# Altium PCB PCB1.PcbDoc
Units mil, origin at the board's own origin, x right, y up, seen from the top; angles counter-clockwise.
Board outline 2558.85 x 1574.8 mil, 2 copper layers (Top Layer, Bottom Layer); 103 components, 76 nets, 372 pads, 67 vias.
Unrouted connection lines stored in the file: 144.
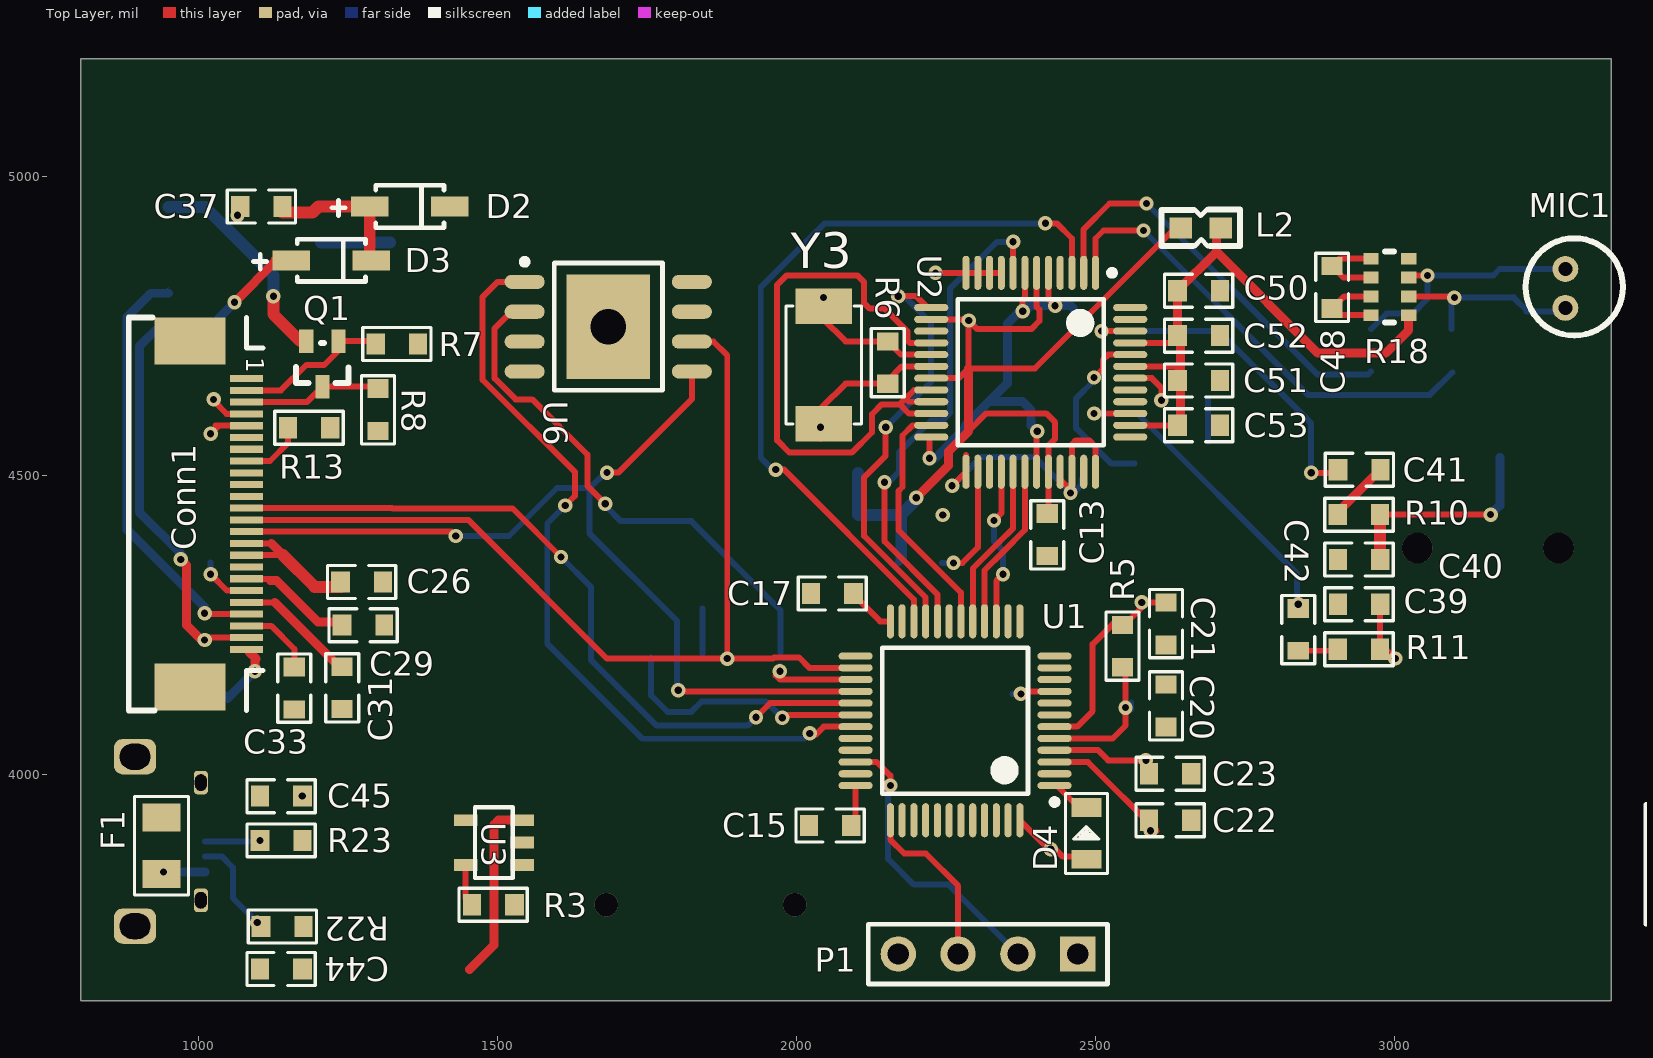
[diagram p0: Top Layer view]
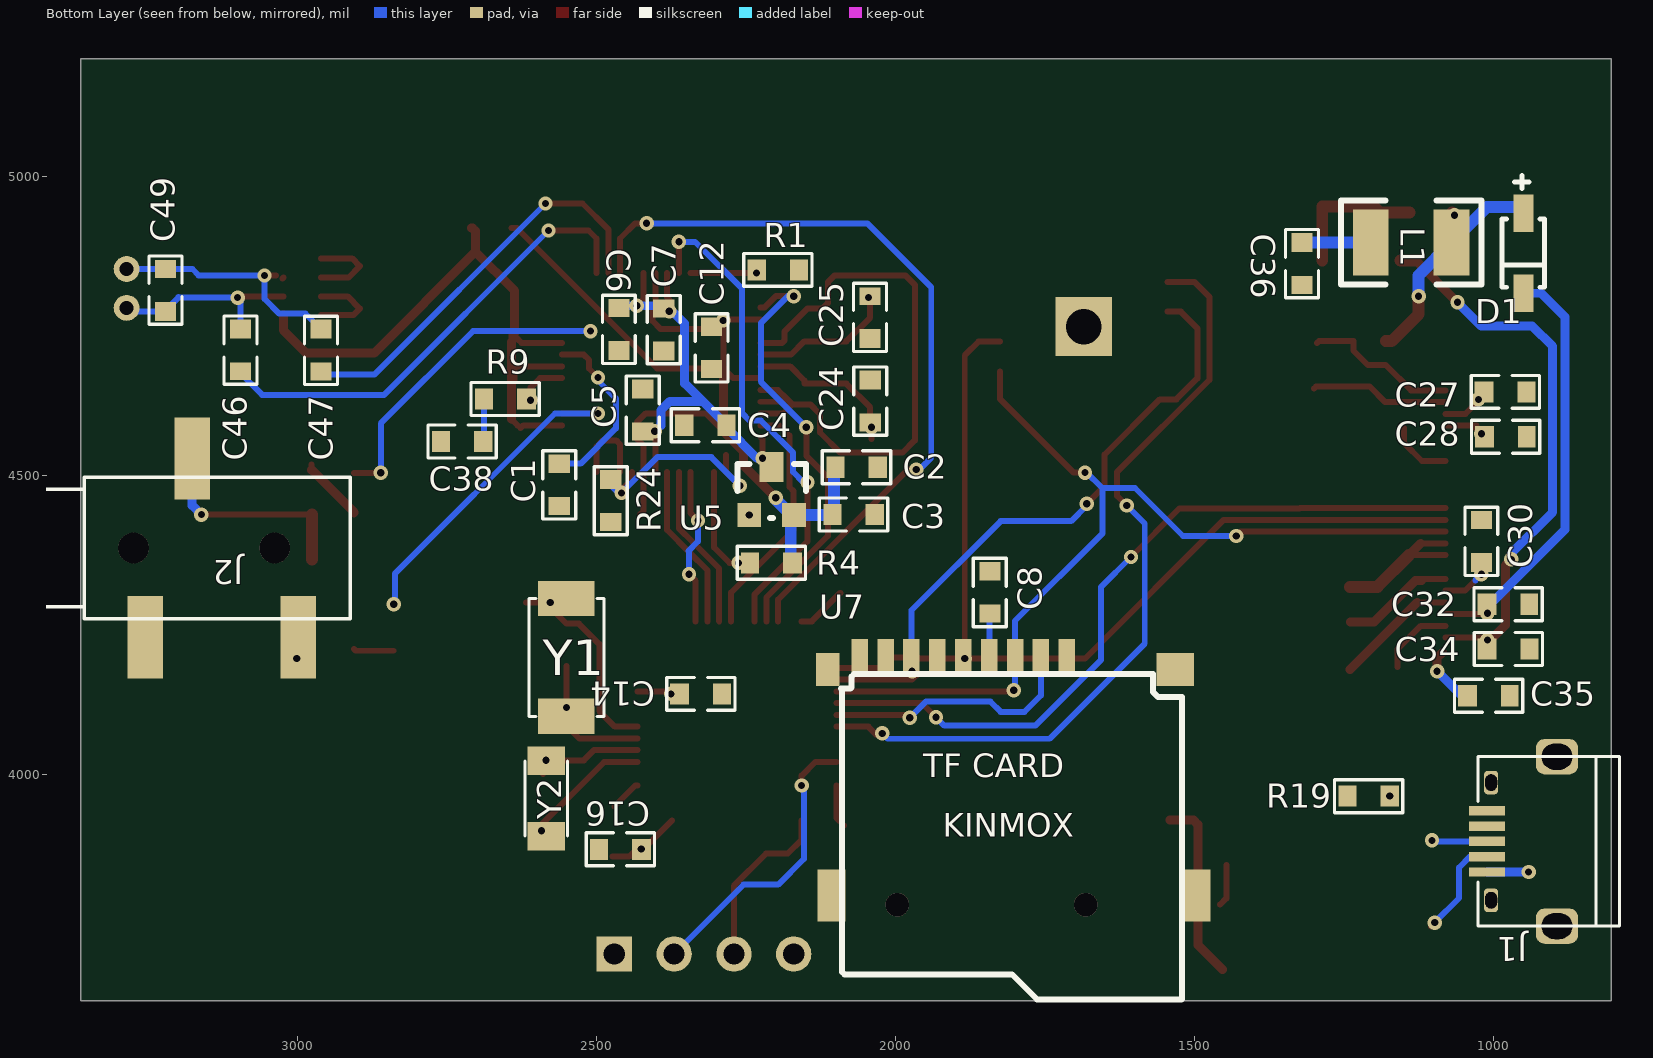
[diagram p1: Bottom Layer view, seen from below]

## Layer stack, top to bottom
Top Solder: solder mask 0.4, Solder Resist, Dk 3.5
Top Layer: signal copper 1.4
Dielectric 1: dielectric 12.6, FR-4, Dk 4.8
Bottom Layer: signal copper 1.4
Bottom Solder: solder mask 0.4, Solder Resist, Dk 3.5

## Board outline
803.15,3622.05 803.15,5196.85 3362,5196.85 3362,3622.05

## Design rules (kind name [scope] priority, off if disabled: settings)
Clearance [All] p1: gap=6 ignorepadtopadclearanceinfootprint=FALSE
HoleSize [All] p1: absolutevalues=TRUE maxlimit=100 minlimit=12 maxpercent=80.000 minpercent=20.000
PlaneConnect [All] p1: pad.planeconnectstyle=Relief pad.reliefexpansion=20 pad.reliefentries=4 pad.reliefconductorwidth=10 pad.reliefairgap=10 via.planeconnectstyle=Direct via.reliefexpansion=20 via.reliefentries=4 via.reliefconductorwidth=10 via.reliefairgap=10
PolygonConnect [All] p1: thpad.connectstyle=Relief thpad.reliefconductorwidth=10 thpad.reliefentries=4 thpad.polygonreliefangle="90 Angle" thpad.airgapwidth=10 smdpad.connectstyle=Relief smdpad.reliefconductorwidth=10 smdpad.reliefentries=4 smdpad.polygonreliefangle="90 Angle" smdpad.airgapwidth=10 via.connectstyle=Direct via.reliefconductorwidth=10 via.reliefentries=4 via.polygonreliefangle="90 Angle" via.airgapwidth=10
RoutingVias [All] p1: holewidth=12 width=24 viastyle="Through Hole" minholewidth=12 minwidth=24 maxholewidth=28 maxwidth=50
SilkToSilkClearance [All] p1: silktosilkclearance=5
SolderMaskExpansion [All] p1: expansion=4
UnRoutedNet [All] p1: checkbadconnections=TRUE
Width [All] p1: maxlimit=30 minlimit=6 preferedwidth=10
26 further rules are at their usual default settings.

## Components (designator, comment, footprint, x,y, rotation, side; value= is the part's Value field where it differs from the comment)
BT1 "Li-Pol" BAT-2 3470,3850 r90 top
C1 "Cap" 0603C 2562,4484.43 r90 bottom value=1uF
C2 "Cap" 0603C 2065,4514.09 r180 bottom locked value=10uF
C3 "Cap" 0603C 2070,4435 r180 bottom value=100nF
C4 "Cap" 0603C 2317.76,4584.09 r0 bottom value=10uF
C5 "Cap" 0603C 2422.32,4609.53 r90 bottom value=100nF
C6 "Cap" 0603C 2462.32,4744.53 r270 bottom value=100nF
C7 "Cap" 0603C 2387.32,4744.09 r270 bottom value=100nF
C8 "Cap" 0603C 1842,4304.57 r90 bottom value=100nF
C9 "Cap" 0603C 4055,3295.43 r0 top value=100nF
C10 "Cap" 0603C 1720,5469.05 r90 top value=100nF
C11 "Cap" 0603C 1795,5468.18 r90 top value=10uF
C12 "Cap" 0603C 2307.32,4713.66 r90 bottom value=10uF
C13 "Cap" 0603C 2419,4401 r90 top value=100nF
C14 "Cap" 0603C 2325.43,4135 r0 bottom value=100nF
C15 "Cap" 0603C 2056,3915 r0 top value=100nF
C16 "Cap" 0603C 2460,3875 r180 bottom value=100nF
C17 "Cap" 0603C 2059.57,4303 r0 top value=100nF
C18 "Cap" 0603C 4355,3775.43 r90 top value=100nF
C19 "Cap" 0603C 4575,3775.43 r90 top value=100nF
C20 "Cap" 0603C 2617.57,4115 r270 top value=18pF
C21 "Cap" 0603C 2617.57,4252.43 r270 top value=18pF
C22 "Cap" 0603C 2624.57,3923.66 r0 top value=18pF
C23 "Cap" 0603C 2624.57,4001.42 r0 top value=18pF
C24 "Cap" 0603C 2042,4624.57 r90 bottom value=18pF
C25 "Cap" 0603C 2042.32,4764.53 r270 bottom value=18pF
C26 "Cap" 0603C 1272.57,4322 r180 top value=10uF
C27 "Cap" 0603C 980,4640 r0 bottom value=1uF
C28 "Cap" 0603C 979.57,4565 r0 bottom value=1uF
C29 "Cap" 0603C 1275,4250 r180 top value=1uF
C30 "Cap" 0603C 1020,4390 r270 bottom value=1uF
C31 "Cap" 0603C 1240,4145 r90 top value=1uF
C32 "Cap" 0603C 975.43,4285 r0 bottom value=1uF
C33 "Cap" 0603C 1160,4144.57 r90 top value=1uF
C34 "Cap" 0603C 975,4210 r0 bottom value=1uF
C35 "Cap" 0603C 1008,4132 r0 bottom value=1uF
C36 "Cap" 0603C 1320,4854.53 r90 bottom value=10uF
C37 "Cap" 0603C 1105,4950 r180 top value=10uF
C38 "Cap" 0603C 2724.57,4557 r180 bottom value=47nF
C39 "Cap" 0603C 2940.47,4284.76 r0 top value=10nF
C40 "Cap" 0603C 2940.47,4359.76 r0 top value=10nF
C41 "Cap" 0603C 2940.91,4509.76 r180 top value=10uF
C42 "Cap" 0603C 2839,4242.57 r90 top value=10uF
C43 "Cap" 0603C 1293.78,3287.52 r90 top value=10nF
C44 "Cap" 0603C 1138,3675 r0 top value=10nF
C45 "Cap" 0603C 1138.13,3964 r0 top value=10nF
C46 "Cap" 0603C 3095,4710 r90 bottom value=1uF
C47 "Cap" 0603C 2960.47,4709.57 r90 bottom value=1uF
C48 "Cap" 0603C 2895.47,4814.76 r270 top value=10uF
C49 "Cap" 0603C 3220.47,4810.1 r270 bottom value=100pF
C50 "Cap" 0603C 2672.32,4809.09 r180 top value=10uF
C51 "Cap" 0603C 2672.32,4659.09 r180 top value=100nF
C52 "Cap" 0603C 2672.32,4734.09 r180 top value=100nF
C53 "Cap" 0603C 2672.32,4584.09 r180 top value=100nF
C54 "Cap" 0603C 4310,3129.57 r90 top value=10uF
Conn1 "eInkScreen" FPC-24P-0.5 989.45,4760.59 r270 top locked
D1 "MBR0530" SOD123 950,4938.86 r90 bottom locked
D2 "MBR0530" SOD123 1286.14,4950 r180 top locked
D3 "MBR0530" SOD123 1155,4860 r180 top locked
D4 "1N4148" 0805LED2 2485,3858.39 r90 top
F1 "PSMD075" 0805-1R 938,3881 r270 top
J1 "USB_MICRO" MicroUSB 915,3876 r270 bottom locked
J2 "Phonejack3" PJ-320B 3356.68,4379 r180 bottom locked
L1 "Inductor" 1210R 1205,4890 r180 bottom locked value=10uH
L2 "600R/100M" L0603 2681.2,4914.09 r180 top
MIC1 "Micphone" mic_4015 3300.47,4815.53 r180 top
P1 "Dbg" HDR1X4 2470,3700 r180 top
Q1 "Si1308" SOT323-N 1207,4687 r180 top
R1 "Res3" 0603R 2196.43,4844 r0 bottom value=100K
R2 "Res3" 0603R 2030,2470 r0 top value=100K
R3 "Res3" 0603R 1492.57,3782.43 r0 top value=2K
R4 "Res3" 0603R 2207.32,4354.09 r180 bottom value=100K
R5 "Res3" 0603R 2545,4215 r270 top locked value=1M
R6 "Res3" 0603R 2152.32,4689.09 r270 top value=1M
R7 "Res3" 0603R 1331.51,4720 r180 top value=10K
R8 "Res3" 0603R 1300,4610 r90 top value=3
R9 "Res3" 0603R 2652.57,4628 r180 bottom value=10
R10 "Res3" 0603R 2940.47,4434.76 r180 top value=20
R11 "Res3" 0603R 2940.47,4209.76 r180 top value=20
R13 "Res3" 0603R 1184.57,4580 r0 top value=10K
R14 "Res3" 0603R 2188.78,3287.52 r90 top value=8K
R15 "Res3" 0603R 1170.63,2569.72 r90 top value=22K
R16 "Res3" 0603R 2793.78,3287.52 r90 top value=10K
R17 "1K" YC164 4742.99,5767.01 r180 top
R18 "1K" YC164 2960.47,4768.27 r90 top
R19 "Res3" 0603R 1208.7,3964 r180 bottom locked value=10K
R22 "Res3" 0603R 1140,3746 r180 top value=22
R23 "Res3" 0603R 1138,3890 r180 top value=22
R24 "Res3" 0603R 2476,4458 r90 bottom value=100K
S1 "SW-PB" SPST-2 4440,5425.43 r90 top
S2 "SW-PB" SPST-2 4600,5425.43 r90 top
S3 "SW-PB" SPST-2 4770,5425.43 r90 top
S4 "SW-PB" SPST-2 4940,5425.43 r90 top
U1 "GD32F103CBT6" LQFP48-7x7 2265,4090 r180 top locked
U2 "VS1053" LQFP48-7x7 2391.54,4672.76 r270 top locked
U3 "LTC4054-4.2C" SOT23-5 1541,3849.03 r270 top
U4 "PT5110-3V3" SOT23 1640.63,5426.73 r90 top
U5 "PT5110-1V8" SOT23 2249.2,4433.46 r180 bottom locked
U6 "GD5F4GQ4UCYID" TSOP8+WSON8-6X5 1685,4749.1 r0 top
U7 "SD_Card" TF_self-eject 1713.3,4195.64 r180 bottom locked
Y1 "8M" XTAL-5032 2550,4196 r270 bottom
Y2 "32.768K" XTAL-3215 2584,3960 r270 bottom
Y3 "12.288M" XTAL-5032 2045.16,4685 r270 top

## Footprints (in the part's own frame and the unit in brackets; to place one, negate y for a bottom-side part, rotate by r counter-clockwise, add the part's x,y. Pads: shape width x height; smd on the part's side, far side on the other; paste and mask are expansions set on the pad)
0603C [mm]
  rect 0.762x0.9 smd: 1(-0.9,0)
  rect 0.8x0.9 smd: 2(0.9,0)
  silkscreen extent -1.45,-0.7 1.45,0.7
0603R [mm]
  rect 0.762x0.9 smd: 1(-0.9,0)
  rect 0.8x0.9 smd: 2(0.9,0)
  silkscreen extent -1.45,-0.7 1.45,0.7
0805-1R [mm]
  rect 1.2x1.6 smd: 1(-1.2,0) 2(1.2,0)
  silkscreen extent -2.1,-1.15 2.1,1.15
0805LED2 [mm]
  rect 0.8x1.27 smd: 1(0,0) 2(2.2,0)
  silkscreen extent -0.6,-0.89 2.8,0.89
1210R [mil]
  rect 60x110 smd: 1(0,0) 2(135,0)
  silkscreen extent -50,-70 185,70
BAT-2 [mm] "Battery; 2 Leads"
  rect 1.5x1.5 hole 0.9: 1(-1.27,0)
  round 1.5 hole 0.9: 2(1.27,0)
  silkscreen extent -2.54,-1.27 2.54,1.27
FPC-24P-0.5 [mm]
  rect 0.3x1.4 smd: 1(2.5,2.3) 2(3,2.3) 3(3.5,2.3) 4(4,2.3) 5(4.5,2.3) 6(5,2.3) 7(5.5,2.3) 8(6,2.3) 9(6.5,2.3) 10(7,2.3) 11(7.5,2.3) 12(8,2.3) 13(8.5,2.3) 14(9,2.3) 15(9.5,2.3) 16(10,2.3) 17(10.5,2.3) 18(11,2.3) 19(11.5,2.3) 20(12,2.3) 21(12.5,2.3) 22(13,2.3) 23(13.5,2.3) 24(14,2.3)
  rect 2x3 smd: 25(15.6,-0.1) 26(0.9,-0.1)
  silkscreen extent -0.1,-2.7 16.6,3, body extent 0.2,-2.86 16.29,3.04, height 2
HDR1X4 [mm] "Connector; Header; 4 Position"
  rect 1.5x1.5 hole 0.9: 1(0,0)
  round 1.5 hole 0.9: 2(2.54,0) 3(5.08,0) 4(7.62,0)
  silkscreen extent -1.27,-1.27 8.89,1.27
L0603 [mil]
  rect 38x35 smd: 1(-28,0) 2(38.87,0)
  silkscreen extent -60,-31 71,30
LQFP48-7x7 [mm] "TSQFP, 48-Leads, Body 7.00x7.00mm, Pitch 0.50mm, IPC Medium Density"
  oval 1.45x0.3 smd: 1(-4.225,2.75) 2(-4.225,2.25) 3(-4.225,1.75) 4(-4.225,1.25) 5(-4.225,0.75) 6(-4.225,0.25) 7(-4.225,-0.25) 8(-4.225,-0.75) 9(-4.225,-1.25) 10(-4.225,-1.75) 11(-4.225,-2.25) 12(-4.225,-2.75) 25(4.225,-2.75) 26(4.225,-2.25) 27(4.225,-1.75) 28(4.225,-1.25) 29(4.225,-0.75) 30(4.225,-0.25) 31(4.225,0.25) 32(4.225,0.75) 33(4.225,1.25) 34(4.225,1.75) 35(4.225,2.25) 36(4.225,2.75)
  oval 0.3x1.45 smd: 13(-2.75,-4.225) 14(-2.25,-4.225) 15(-1.75,-4.225) 16(-1.25,-4.225) 17(-0.75,-4.225) 18(-0.25,-4.225) 19(0.25,-4.225) 20(0.75,-4.225) 21(1.25,-4.225) 22(1.75,-4.225) 23(2.25,-4.225) 24(2.75,-4.225) 37(2.75,4.225) 38(2.25,4.225) 39(1.75,4.225) 40(1.25,4.225) 41(0.75,4.225) 42(0.25,4.225) 43(-0.25,4.225) 44(-0.75,4.225) 45(-1.25,4.225) 46(-1.75,4.225) 47(-2.25,4.225) 48(-2.75,4.225)
  silkscreen extent -4.35,-3.1 3.1,3.57, body extent -3.5,-3.5 3.5,3.5, height 0.8
mic_4015 [mm]
  round 1.1 hole 0.6: 1(0.381,0.889) 2(0.381,-0.762)
  silkscreen extent -2.07,-2.07 2.07,2.07
MicroUSB [mm]
  round 0 on Bottom Overlay: 0(0.986,-3.776)
  rect 0.4x1.524 smd: 1(0.986,-2.426) 2(0.336,-2.426) 3(-0.314,-2.426) 4(-0.964,-2.426) 5(-1.614,-2.426)
  rrect50% 1.5x1.8 hole 1.1 slot 1.3 at 90 deg: 5(-3.911,0.543) 5(3.286,0.543)
  rrect50% 1x0.6 hole 0.5 slot 0.7 at 0 deg: 5(-2.812,-2.254) 5(2.188,-2.254)
  silkscreen extent -3.91,-2.81 3.29,3.19
PJ-320B [mm]
  round 1.3 hole 1.3: 0(2.1,0) 0(8.1,0)
  rect 1.5x3.5 smd: 1(9.1,-3.8) 3(4.6,3.8) 5(2.6,-3.8)
  silkscreen extent -2.7,-3 11.3,3, body extent -2.7,-5.2 11.3,5.2, height 5
SOD123 [mm]
  rect 1.6x0.85 smd: 1(0,0) 2(-3.4,0)
  silkscreen extent -3.15,-0.9 1.6,0.9
SOT23 [mil]
  rect 40x40 smd: 1(4.88,0.63) 3(79.88,0.63)
  rect 40x50 smd: 2(41.88,80.63)
  silkscreen extent -15,-4 100,86
SOT23-5 [mm]
  rect 0.5x1 smd: 1(0,0) 2(-0.95,0) 3(-1.9,0) 4(-1.9,-2.4) 5(0,-2.4)
  silkscreen extent -2.45,-2 0.55,-0.4
SOT323-N [mm]
  rect 0.6x1 smd: 1(-0.686,-0.965) 2(0.686,-0.965) 3(0,0.965)
  silkscreen extent -1.12,-0.89 1.12,0.81
SPST-2 [mm] "Switch; 2 Leads"
  rect 1.85x1.85 hole 1.1: 1(-2.54,0)
  round 1.85 hole 1.1: 2(2.54,0)
  silkscreen extent -4.89,-1.27 4.28,1.27
TF_self-eject [mm]
  rect 0.7x1.6 smd: 1(0,0) 2(-1.1,0) 3(-2.2,0) 4(-3.3,0) 5(-4.4,0) 6(-5.5,0) 7(-6.6,0) 8(-7.7,0) 9(-8.8,0)
  rect 1x1.4 smd: 10(-10.16,-0.508)
  rect 1.6x1.4 smd: 11(4.6,-0.5)
  rect 1.2x2.2 smd: 12(5.5,-10.1) 13(-10,-10.1)
  silkscreen extent -9.59,-14.52 4.9,-0.7, body extent -10.2,-17.1 5.8,0.72, height 1.85
TSOP8+WSON8-6X5 [mm] "TSOP, 8-Leads, Body 5.28x5.28mm, Pitch 1.27mm, Thermal Pad 4.45x3.55mm, IPC Medium Density"
  oval 1.7x0.6 smd: 1(-3.55,1.905) 2(-3.55,0.635) 3(-3.55,-0.635) 4(-3.55,-1.905) 5(3.55,-1.905) 6(3.55,-0.635) 7(3.55,0.635) 8(3.55,1.905)
  rect 2.4x2.5 hole 1.5: 4(0,0)
  rect 3.55x4.45 smd: 4(0,0)
  silkscreen extent -3.67,-2.7 2.3,2.88, body extent -2.7,-2.7 2.7,2.7, height 0.8
XTAL-3215 [mm]
  rect 1.2x1.6 smd: 1(-1.6,0) 2(1.6,0)
  silkscreen extent -1.6,-0.9 1.6,0.9
XTAL-5032 [mm]
  rect 1.5x2.4 smd: 1(-2.5,0) 2(2.5,0)
  silkscreen extent -2.5,-1.6 2.5,1.6
YC164 [mm]
  rect 0.5x0.65 smd: 1(0,0) 2(0.8,0) 3(1.6,0) 4(2.4,0) 5(2.4,-1.6) 6(1.6,-1.6) 7(0.8,-1.6) 8(0,-1.6)
  silkscreen extent -0.3,-0.98 2.7,-0.6, body extent -0.3,-1.6 2.7,0, height 1

## Part data
BT1: library part Battery, "Multicell Battery", LatestRevisionDate=17-Jul-2002, LatestRevisionNote="Re-released for DXP Platform.", PackageDescription="Battery; 2 Leads", PackageReference=BAT-2, Published=24-Mar-1999, Publisher="Altium Limited"
C1 C2 C3 C4 C5 C6 C7 C8 C9 C10 C11 C12 C13 C14 C15 C16 C17 C18 C19 C20 C21 C22 C23 C24 C25 C26 C27 C28 C29 C30 C31 C32 C33 C34 C35 C36 C37 C38 C39 C40 C41 C42 C43 C44 C45 C46 C47 C48 C49 C50 C51 C52 C53 C54: "Capacitor", LatestRevisionDate=17-Jul-2002, LatestRevisionNote="Re-released for DXP Platform.", PackageDescription="Radial Cap, Thru-Hole; 2 Leads; 0.3 in Pin Spacing", PackageReference=RAD-0.3, Published=8-Jun-2000, Publisher="Altium Limited"
Conn1: library part eINK_FPC24
D1 D2 D3: library part "D Schottky", "Schottky Diode", Code_JEDEC=DO-214-AA, LatestRevisionDate=17-Jul-2002, LatestRevisionNote="Re-released for DXP Platform.", PackageDescription="DO-214-AA/SMB; 2 C-Bend Leads; Body 5.3 x 3.6 mm, inc. leads (LxW)", PackageReference=SMB, Published=8-Jun-2000, Publisher="Altium Limited"
D4: library part "Diode 1N4148", "High Conductance Fast Diode", Code_JEDEC=DO-204-AH, ComponentLink1Description="Manufacturer Link", ComponentLink1URL=http://www.fairchildsemi.com/, ComponentLink2Description=Datasheet, ComponentLink2URL=http://www.fairchildsemi.com/ds/1N%2F1N4148.pdf, DatasheetVersion=1997, LatestRevisionDate=17-Jul-2002, LatestRevisionNote="Re-released for DXP Platform.", PackageDescription="Diode, Axial; Body 3.8 x 1.9 mm (LxDia. max), Lead Dia. 0.53 mm (max)", PackageReference=DO-35, Published=8-Jun-2000, Publisher="Altium Limited"
F1: library part "Fuse 2", "Fuse", LatestRevisionDate=17-Jul-2002, LatestRevisionNote="Re-released for DXP Platform.", PackageDescription="Thru-Hole; 2 Leads", PackageReference=PIN-W2/E2.8, Published=8-Jun-2000, Publisher="Altium Limited"
J2: "Jack Socket, 1/4\" [6.5mm], Thru-Hole, Vertical, 3-Conductor Open Circuit (Non-Normalling)", PackageDocument=2003, ComponentLink1Description="Manufacturer Link", ComponentLink1URL=http://www.cliffuk.co.uk/, DatasheetDocument=2003, DrillAndSlotSize="Corresponds to nominal value.", LatestRevisionDate=15-Jul-2004, LatestRevisionNote="Component Replaced.", PackageReference=S1VS_SSS, PCB_Layout="Complies with manufacturer's recommendation.", Published=15-Jul-2004, Publisher="Altium Limited"
L2: library part INDUCTOR_0_Dup1, "RoHS BEAD/600ohm 100Mhz Z=600Ω DCR<0.2Ω 800mA SMT L0603", Package=SMT, OriginalSymbolOrigin=(10,0), Pin Names Rotate=TRUE, Pin Names Visible=FALSE, Pin Numbers Visible=TRUE
MIC1: library part Micphone_0, mypage=13
P1: library part "Header 4", "Header, 4-Pin", LatestRevisionDate=17-Jul-2002, LatestRevisionNote="Re-released for DXP Platform.", Publisher="Altium Limited"
Q1: library part PwrMOS_N
R1 R2 R3 R4 R5 R6 R7 R8 R9 R10 R11 R13 R14 R15 R16 R19 R22 R23 R24: "Resistor", LatestRevisionDate=29-May-2009, LatestRevisionNote="IPC-7351 Footprint Added.", PackageDescription="Chip Resistor", PackageReference=J1-0603, Published=8-Jun-2000, Publisher="Altium Limited"
R17 R18: library part ResPak-8P4R
S1 S2 S3 S4: "Switch", LatestRevisionDate=17-Jul-2002, LatestRevisionNote="Re-released for DXP Platform.", PackageDescription="Switch; 2 Leads", PackageReference=SPST-2, Published=24-Mar-1999, Publisher="Altium Limited"
U1: library part STM32F103CxT6
U3: library part LTC4054
U4 U5: library part PT5110
U6: library part W25Qxx
Y1 Y2 Y3: library part XTAL, "Crystal Oscillator", LatestRevisionDate=17-Jul-2002, LatestRevisionNote="Re-released for DXP Platform.", PackageDescription="Crystal, Thru-Hole; 2 Leads; Body 3.1 x 8.2 mm (Dia.xH)", PackageReference=R38, Published=8-Jun-2000, Publisher="Altium Limited"
L1: Code_IEC=1005, Code_JEITA=0402, LatestRevisionDate=29-May-2009, LatestRevisionNote="IPC-7351 Footprint Added.", PackageDescription="Chip Inductor", PackageReference=0402-A, Published=8-Jun-2000, Publisher="Altium Limited"

## Via types
v1: diameter 24, hole 12, Top Layer to Bottom Layer, 65 vias
v2: diameter 39.37, hole 39.37, Top Layer to Bottom Layer, 2 vias

## Nets (pads, with @x,y where several pads share a name; then routed paths per layer and width w, separated by ;. In a path a pad name is that pad's centre, name@x,y a point inside that pad or via, vN(x,y) a via of type N, cw(c..) or ccw(c..) an arc to the next point about the centre after c; other vN are vias at no path point)
1V8: C4.1 C5.1 C6.1 C7.1 U2.5 U2.7 U2.24 U2.31 U5.2 | length 785.1
  Top Layer w10: v1(2222.32,4529.09) 2222.32,4561.61 U2.24 ; v1@2374.6,4768 2378,4771.4 v1(2378,4775) 2378,4794 2381.69,4797.69 U2.7 ; U2.31 2401.38,4573.15 v1(2402.32,4574.09) ; U2.5 2421.32,4838.83 2421.32,4795.09 v1(2432.32,4784.09)
  Bottom Layer w10: C4.1@2282.32,4579.84 C4.1
  Bottom Layer w15: v1(2222.32,4529.09) 2231.57,4529.09 C4.1@2282.32,4579.84 ; C4.1 2322.32,4624.09 ; v1(2378,4775) 2381.66,4775 2377.66,4779 C7.1@2378.19,4779.53 ; v1(2402.32,4574.09) 2392.32,4584.09 2392.32,4609.09 2377.32,4624.09 2322.32,4624.09 ; C6.1 2458.19,4784.09 v1(2432.32,4784.09) 2391.89,4784.09 C7.1 ; 2322.32,4624.09 2352.32,4654.09 2352.32,4754.09 2377.76,4779.53 C7.1@2378.19,4779.53 ; C7.1@2378.19,4779.53 2382.76,4784.09 C7.1 ; C7.1@2378.19,4779.53 C7.1
3V3: C2.1 C3.1 C8.1 C9.2 C12.2 C13.2 C14.2 C15.2 C16.2 C17.2 C18.2 C19.2 C26.2 C36.2 Conn1.15 Conn1.16 D4.1 L1.1 L2.2 P1.1 R4.2 R16.1 R17.5 R17.6 R17.7 R17.8 U1.9 U1.24 U1.36 U1.48 U2.6 U2.14 U2.19 U2.32 U4.2 U5.3 U6.3 U6.7 U6.8 U7.4 | length 2515.2
  Top Layer w10: Conn1.16 1141.11,4366.89 ; Conn1.15 1121.42,4386.57 ; C15.2@2085.87,3915 2098.66,3927.8 U1.36 ; C17.2@2092,4304 2139.66,4256.34 U1.24 ; U2.19 2271.14,4662.91 2287.76,4679.53 ; U2.14 2285.94,4761.34 v1(2287.76,4759.53) ; 2287.76,4574.53 2317.32,4604.09 2417.32,4604.09 2432.32,4589.09 2432.32,4561.57 2421.06,4550.31 U2.32 2421.06,4440.79 C13.2@2427.32,4434.53 ; U1.48 v1@2423.25,3873.68 ; v1(2375,4135) 2379.21,4139.21 U1.9 ; U2.6 2401.38,4782.15 2406,4777.53 2406,4758.47 2392.53,4745 2302.28,4745 v1(2287.76,4759.53) ; v1@2428.78,3879.22 2445.28,3862.72 D4.1@2472.72,3862.72 ; L2.2 2633.09,4914.09 2398.53,4679.53 2287.76,4679.53 ; 2287.76,4679.53 v1(2287.76,4759.53)
  Top Layer w15: 1121.42,4386.57 1141.11,4366.89 ; v1(2200,4463) 2254,4517 2254,4540.77 2287.76,4574.53 2287.76,4679.53
  Top Layer w20: 1141.11,4366.89 1194,4314 C26.2@1240,4314
  Bottom Layer w10: C8.1@1842.43,4278 1842.43,4196.43 U7.4 ; C3.1@2102.32,4434.96 C3.1@2103.19,4434.09 ; R4.2 2169.32,4356.66 R4.2@2175,4362.34 ; v1@2198.23,4463 v1(2200,4463) v1@2200,4460 ; C14.2 v1(2375,4135) ; C16.2 v1(2425,3875.43)
  Bottom Layer w20: L1.1 C36.2 C36.2 ; C3.1@2102.32,4434.96 C2.1@2102.32,4504.09 ; C3.1@2103.19,4434.09 U5.3 ; R4.2@2175,4362.34 2175,4435 v1@2200,4460
3V3_A: C50.2 C51.2 C52.2 C53.2 L2.1 R18.8 U2.38 U2.43 U2.45 | length 1072
  Top Layer w10: U2.38 2622.24,4584.17 C53.2@2627.11,4579.31 ; U2.43 2636.89,4682.6 C51.2 C51.2@2642.32,4659.09 ; U2.45 2625.2,4721.97 C52.2@2631.46,4728.23 ; C53.2@2631.89,4584.09 C53.2@2642.32,4594.53 ; C52.2@2634.61,4731.38 2639.32,4736.09 2642.32,4739.09 2642.32,4723.66 C52.2@2639.32,4726.66
  Top Layer w15: C52.2@2639.32,4736.09 2636.89,4738.53 C50.2 2702.32,4874.53 ; C53.2@2642.32,4594.53 2642.32,4659.09 C52.2@2642.32,4723.66 ; L2.1 2707.32,4914.09 2702.32,4909.09 2702.32,4874.53 ; R18.8 3023.46,4743.46 2985,4705 2871.85,4705 2702.32,4874.53
5V: C54.2 F1.1 R2.1 U3.4
C\H\R\G\: R2.2 U1.38 U3.1
DREQ: U1.20 U2.8 | length 843.5
  Top Layer w10: v1(2147,4489) 2147,4390 2235.47,4301.53 U1.20 ; U2.8 v1(2362.01,4890.99)
  Bottom Layer w10: v1(2147,4489) 2154,4489 2171,4506 2171,4538.33 2224.67,4592 2244,4592 2256.32,4604.32 2256.32,4812.32 2334.99,4890.99 v1(2362.01,4890.99)
GDR: Conn1.2 Q1.1 R7.2 | length 259.4
  Top Layer w10: Conn1.2 1137.48,4642.48 1180,4685 1210,4685 1234,4709 Q1.1 1291.54,4725 R7.2@1294.57,4721.97
GND: BT1.2 C1.1 C2.2 C3.2 C4.2 C5.2 C6.2 C7.2 C8.2 C9.1 C10.1 C11.1 C12.1 C13.1 C14.1 C15.1 C16.1 C17.1 C18.1 C19.1 C20.2 C21.2 C22.2 C23.2 C24.2 C25.2 C26.1 C27.1 C28.1 C29.1 C30.1 C31.1 C32.1 C33.1 C34.1 C35.1 C36.1 C38.1 C39.1 C40.1 C43.1 C44.1 C45.1 C50.1 C51.1 C52.1 C53.1 C54.1 Conn1.17 Conn1.25 Conn1.26 D2.2 J1.4 J1.5 J2.5 P1.4 R1.1 R3.2 R7.1 R8.1 R13.2 R15.2 R18.5 R24.1 S1.1 S2.1 S3.1 S4.1 U1.8 U1.23 U1.35 U1.44 U1.47 U2.4 U2.16 U2.20 U2.21 U2.22 U2.35 U2.37 U2.40 U2.41 U2.47 U3.2 U4.1 U5.1 U6.4 U7.6 U7.10 U7.11 U7.12 U7.13 | length 1032.8
  Top Layer w10: U2.22 2187.56,4603.86 2172.32,4619.09 ; U2.21 2187.87,4623.54 2182.32,4629.09 ; U2.20 2196.46,4643.23 2182.32,4629.09 ; U2.16 2189.45,4721.97 2185.65,4725.76 2185.65,4740.76 2147.32,4779.09 2122.32,4779.09 2112.32,4789.09 2112.32,4824.09 2101.42,4835 1983.23,4835 1967.32,4819.09 1967.32,4559.09 1988.09,4538.33 2092.15,4538.33 2126,4572.18 2126,4602.77 2142.32,4619.09 2172.32,4619.09 ; 2172.32,4619.09 2182.32,4629.09
  other v1: 2244.32,4434.09
KEY1: R17.1 S1.2 U1.19
KEY2: R17.2 S2.2 U1.25
KEY3: R17.3 S3.2 U1.43
KEY4: R17.4 S4.2 U1.46
MICN: C47.1 U2.2 | length 691.3
  Top Layer w10: U2.2 2480.12,4911.89 2523.23,4955 v1(2585,4955)
  Bottom Layer w10: v1(2585,4955) 2870.67,4669.33 2955.67,4669.33 C47.1
MICP: C46.1 U2.1 | length 789.6
  Top Layer w10: U2.1 2499.8,4896.57 2513.23,4910 v1(2580,4910)
  Bottom Layer w10: v1(2580,4910) 2855,4635 3059,4635 C46.1@3096.78,4672.78
NetC1_2: C1.2 U2.44 | length 304.4
  Top Layer w10: v1(2497.32,4664.09) 2512.32,4679.09 2512.32,4693.5 2521.11,4702.28 U2.44
  Bottom Layer w10: v1(2497.32,4664.09) 2497.32,4659.09 2467.32,4629.09 2467.32,4579.09 2526.42,4520 C1.2@2565,4520
NetC27_2: C27.2 Conn1.4 | length 66.6
  Top Layer w10: v1(1025,4627.5) 1025,4625 1046.89,4603.11 Conn1.4
NetC28_2: C28.2 Conn1.5 | length 77.6
  Top Layer w10: v1(1020,4570) 1033.42,4583.43 ; 1028.42,4583.43 Conn1.5
  Bottom Layer w10: C28.2 v1(1020,4570)
NetC29_2: C29.2 Conn1.18 | length 189.2
  Top Layer w10: Conn1.18 1117.48,4327.52 1120,4325
  Top Layer w15: 1120,4325 1130,4325 1200,4255 C29.2@1239.13,4255
NetC30_2: C30.2 Conn1.19 | length 105
  Top Layer w10: v1(1020,4335) 1047.16,4307.84 Conn1.19
  Bottom Layer w10: C30.2 v1(1020,4335) 1030,4325
NetC31_2: C31.2 Conn1.20 | length 206.7
  Top Layer w10: Conn1.20 1127.28,4288.15
  Top Layer w15: 1127.28,4288.15 C31.2@1240,4175.43
NetC33_2: C33.2 Conn1.22 | length 126.1
  Top Layer w10: Conn1.22 1121.22,4248.78 1160,4210 C33.2
NetC35_2: C35.2 Conn1.24 | length 108.3
  Top Layer w15: Conn1.24@1085,4204.41 1096,4193.41 1094,4191.41 v1(1094,4173)
  Bottom Layer w15: C35.2 1048.22,4127.22 v1(1094,4173)
NetC37_1: C37.1 D2.1 D3.2 | length 239.9
  Top Layer w20: C37.1@1140.43,4940 1190.43,4940 1200.43,4950 D2.1 D3.2@1286.14,4860
NetC37_2: C37.2 D1.1 L1.2 Q1.2 | length 367.3
  Top Layer w20: v1(1065,4935.43) C37.2@1069.57,4940 ; v1(1125,4800) 1125,4770 1170,4725 Q1.2
  Bottom Layer w20: D1.1@950,4948.86 1011.14,4948.86 L1.2 1125,4835 v1(1125,4800)
NetC38_2: C38.2 R9.1 | length 71.5
  Bottom Layer w10: R9.1 2688,4558.13 C38.2
NetC39_2: C39.2 J2.1 R11.1 | length 106.7
  Top Layer w10: C39.2 R11.1 2985.47,4209.76 v1(3001.1,4194.13)
NetC40_2: C40.2 J2.3 R10.1 | length 361.2
  Top Layer w10: R10.1 v1(3160.47,4434.76)
  Top Layer w20: C40.2 R10.1
  Bottom Layer w15: v1(3160.47,4434.76) 3176,4450.29 J2.3@3176,4530
NetC41_1: C41.1 R10.2 | length 113.7
  Top Layer w10: R10.2 R10.2@2905.04,4438.46 ; C41.1 C41.1@2976.34,4518.9
  Top Layer w15: R10.2@2905.04,4438.46 C41.1
NetC41_2: C41.2 U2.46 | length 590.2
  Top Layer w10: v1(2509.88,4741.65) U2.46 ; v1(2860.47,4504.76) C41.2@2905.47,4504.76
  Bottom Layer w10: v1(2509.88,4741.65) 2706.35,4741.65 2860.47,4587.53 v1(2860.47,4504.76)
NetC42_1: C42.1 R11.2 | length 67.1
  Top Layer w10: C42.1 2902.41,4207.13 R11.2
NetC42_2: C42.2 U2.39 | length 569.5
  Top Layer w10: v1(2497.56,4603.86) U2.39 ; C42.2 v1(2839,4285)
  Bottom Layer w10: v1(2497.56,4603.86) 2569.14,4603.86 2837,4336 2837,4287 v1(2839,4285)
NetC46_2: C46.2 C49.2 MIC1.1 R18.7 | length 331.9
  Top Layer w10: R18.7 v1@3100,4799.76
  Bottom Layer w10: C46.2 3095,4792.69 v1(3100,4797.69) 3200,4797.69 ; 3198.41,4798.46 3221.34,4775.53 C49.2 3279.61,4774.67 MIC1.1
NetC47_2: C47.2 C49.1 MIC1.2 R18.6 | length 410.4
  Top Layer w10: R18.6 R18.6@3024.96,4829.76 ; R18.6@3035.47,4834.76 v1(3055,4834.76)
  Bottom Layer w10: C47.2 2986.47,4771 3030.33,4771 3055,4795.67 v1(3055,4834.76) 3165,4834.76 ; 3165.47,4835.53 3175.47,4845.53 C49.1 MIC1.2
NetC48_1: C48.1 R18.3 R18.4 | length 143.5
  Top Layer w10: R18.3 2914.41,4831.26 C48.1 2908.54,4863.27 2959.96,4863.27 R18.4
NetC48_2: C48.2 R18.1 R18.2 | length 143
  Top Layer w10: R18.1 2906.54,4768.27 C48.2 2915.91,4799.76 R18.2
NetConn1_8: Conn1.8 R13.1 | length 107.3
  Top Layer w10: Conn1.8 1119.37,4524.37 1149.13,4554.13 R13.1
NetD4_2: D4.2 U1.1 | length 53.2
  Top Layer w10: U1.1 2434.88,3981.73 D4.2@2470,3946.61
NetF1_2: F1.2 J1.1 | length 69.5
  Bottom Layer w15: v1(941,3837.17) J1.1
NetJ1_2: J1.2 R22.2 | length 172.6
  Top Layer w10: v1(1098,3752.57) R22.2
  Bottom Layer w10: J1.2 1039.24,3862.76 1057.24,3844.76 1057.24,3793.76 1098,3753 v1(1098,3752.57)
NetJ1_3: J1.3 R23.2 | length 92.7
  Bottom Layer w10: J1.3 1100.92,3888.35 v1(1102.57,3890)
NetR1_2: R1.2 U2.9 U2.10 U2.11 U2.12 | length 110
  Top Layer w10: v1(2232.32,4839.09) U2.12 U2.11 U2.10 U2.9
NetR3_1: R3.1 U3.5 | length 71
  Top Layer w10: U3.5 1446.51,3793.06 R3.1
NetR4_1: R4.1 U2.26 | length 197.5
  Top Layer w10: v1(2262.32,4354.09) 2277.32,4354.09 2302.95,4379.72 U2.26
  Bottom Layer w10: R4.1 v1(2262.32,4354.09)
NetR9_2: R9.2 U2.42 | length 85.6
  Top Layer w10: U2.42 2594.09,4662.91 2610,4647 v1(2610,4626)
  Bottom Layer w10: v1(2610,4626) R9.2@2610,4631.87
NetR24_2: R24.2 U2.25 U2.33 U2.34 U2.36 | length 515.3
  Top Layer w10: v1(2260,4483.15) U2.25 U2.25@2283.27,4534.27 ; U2.33 2440.75,4493.25 2460.43,4473.57 v1(2458,4471.13) ; U2.34 2460.43,4552.43 2467,4559 2489.61,4559 2499.8,4548.8 U2.36
  Bottom Layer w10: v1(2260,4483.15) 2307.85,4531 2398.13,4531 v1(2458,4471.13) 2463.13,4471.13 2476,4484 R24.2
RESE: Conn1.3 Q1.3 R8.2 | length 232.3
  Top Layer w10: Conn1.3 1180.8,4622.8 Q1.3 1296.43,4649 R8.2
RST: C43.2 Conn1.10 R16.2 U1.7
ScrBusy: Conn1.9 U1.40
ScrD/C: Conn1.11 U1.39
SPI1_CS#: U1.18 U2.23 | length 412.3
  Top Layer w10: U2.23 2194.17,4584.17 2177,4567 2177,4481 2170,4474 2170,4409 2274.84,4304.16 U1.18
SPI1_MISO: U1.16 U2.30 | length 278.1
  Top Layer w10: U1.16 2314.21,4341.74 2345.47,4373 2345.63,4373 2381.69,4409.07 U2.30
SPI1_MOSI: U1.17 U2.29 | length 278.1
  Top Layer w10: U1.17 2294.85,4256.66 2294.85,4345 2338.85,4389 2339,4389 2362.01,4412.01 U2.29
SPI1_SCK: U1.15 U2.28 | length 267
  Top Layer w10: v1(2330,4425) 2342.32,4437.32 U2.28 ; U1.15 2333.9,4323.9 v1(2345,4335)
  Bottom Layer w10: v1(2330,4425) 2330,4390 2346.24,4373.76 2345,4372.53 v1(2345,4335)
SPI2_CS#1: Conn1.12 U1.29 | length 1256.2
  Top Layer w10: Conn1.12 1323.37,4445.63 1324,4445 1525,4445 v1(1606,4364) ; v1(1932,4096) 1955.53,4119.53 U1.29
  Bottom Layer w10: v1(1606,4364) 1656,4314 1656,4192.1 1766.11,4082 1918,4082 v1(1932,4096)
SPI2_CS#2: U1.30 U7.2 | length 436.9
  Top Layer w10: v1(1976,4095) 1980.84,4099.84 U1.30
  Bottom Layer w10: U7.2 1756.61,4132.39 1784,4105 1824,4105 1841,4122 1949,4122 v1(1976,4095)
SPI2_CS#3: U1.31 U6.1 | length 1334.8
  Top Layer w10: U6.1 1500,4824.1 1475,4799.09 1475,4660 1628.76,4506.24 1629,4506.24 1629,4466 v1(1613,4450) ; v1@2022,4066 2031,4066 2045.16,4080.16 U1.31
  Bottom Layer w10: v1(1613,4450) 1583,4420 1583,4219 1742,4060 2013,4060 v1(2022,4069)
SPI2_MISO: U1.27 U6.2 U7.7 | length 1051.3
  Top Layer w10: U6.2 1522.76,4774.1 1495,4746.34 1495,4662.63 1530.13,4627.5 1557.74,4627.5 1650,4535.24 1650,4483 v1(1680,4453) ; v1(1972,4173) 1965,4166 1972.1,4158.9 U1.27
  Bottom Layer w10: v1(1680,4453) 1680,4450 1706,4424 1824,4424 1973.14,4274.86 U7.7 ; v1(1972,4173) U7.7@1972,4182
SPI2_MOSI: Conn1.14 U1.28 U6.5 U7.3 | length 1588.2
  Top Layer w10: Conn1.14 1422.74,4406.26 v1(1430,4399) ; v1(1683,4505) 1702,4505 1824.77,4627.77 U6.5 ; v1(1802,4141) 1802,4139.21 U1.28
  Bottom Layer w10: v1(1430,4399) 1519,4399 1599.24,4479.24 1654,4479.24 ; v1(1683,4505) 1681.38,4506.62 1654,4479.24 ; v1(1802,4141) 1799.91,4143.09 U7.3 1799.91,4257.09 1654,4403 1654,4479.24
SPI2_SCK: Conn1.13 U1.26 U6.6 U7.5 | length 1698.6
  Top Layer w10: Conn1.13 1451.06,4425.94 1683,4194 v1(1884,4194) ; U6.6 1860.9,4724.1 1884,4701 v1(1884,4194) ; U1.26 2021.42,4178.58 2004,4196 1962.47,4196 1960.47,4194 v1(1884,4194)
STM32_X32I: C22.1 U1.3 Y2.2 | length 228.3
  Top Layer w10: U1.3 2486.9,4021.1 2602,3906 v1(2592,3906)
STM32_X32O: C23.1 U1.4 Y2.1 | length 184.3
  Top Layer w10: U1.4 2504.21,4040.79 2521,4024 v1(2584,4024) 2589.13,4018.87 C23.1
STM32_XI: C20.1 R5.2 U1.5 Y1.2 | length 239.6
  Top Layer w10: U1.5 2528.47,4060.47 2550,4082 v1(2550,4112) R5.2@2550,4181.57
  Bottom Layer w10: Y1.2@2559,4108.57 Y1.2@2559,4121
STM32_XO: C21.1 R5.1 U1.6 Y1.1 | length 337.9
  Top Layer w10: U1.6 2469.16,4080.16 2495.16,4106.16 2495.16,4218.16 2529.43,4252.43 2550,4252.43 2585.43,4287.87 C21.1
  other v1: 2577,4288
SWDCK: P1.3 U1.37 | length 291.7
  Top Layer w10: U1.37 2156.73,3891.27 2180,3868 2216,3868 2270,3814 P1.3
SWDIO: P1.2 U1.34 | length 491.2
  Top Layer w10: U1.34 2133.9,4021.1 2156.73,3998.27 v1(2156.73,3981.73)
  Bottom Layer w10: v1(2156.73,3981.73) 2153,3978 2153,3859 2196,3816 2254,3816 P1.2
USB_D_N: C44.2 R22.1 U1.32
USB_D_P: C45.2 R19.2 R23.1 U1.33 | length 0.3
  Top Layer w10: v1(1173.27,3964) C45.2
USB_PU: R19.1 U1.41
VBAT: BT1.1 C10.2 C11.2 R14.2 U3.3 U4.3 | length 309
  Top Layer w15: 1453,3674.43 1494,3715.43 1494,3916.43 1501.4,3923.83 U3.3
VGH: C32.2 Conn1.21 D1.2 | length 720.2
  Top Layer w10: v1(1010,4270) 1011.53,4268.47 Conn1.21
  Bottom Layer w0: D1.2@940,4805 D1.2@950,4815
  Bottom Layer w10: v1(1010,4270) C32.2@1010,4280
  Bottom Layer w15: D1.2 940,4805 920,4805 880,4765 880,4410 C32.2@1010,4280
VGL: C34.2 Conn1.23 D3.1 | length 931.8
  Top Layer w10: v1@1000.91,4229.09 Conn1.23
  Top Layer w15: v1(970,4360) 980,4350 980,4250 1000.91,4229.09 1005,4225 v1(1010,4225) ; v1(1060,4790) D3.1@1130,4860
  Top Layer w20: D3.1@1130,4860 D3.1
  Bottom Layer w15: v1(970,4360) 970,4370 901,4439 901,4716 935,4750 1020,4750 v1(1060,4790)
VS_SHDN: U1.22 U2.3 | length 1308.6
  Top Layer w10: v1(1965,4510) 1979,4510 2196.1,4292.9 U1.22 ; v1(2416,4922) 2435,4922 2460.43,4896.57 U2.3
  Bottom Layer w10: v1(1965,4510) 1960,4510 1940,4530 1940,4815 2047,4922 v1(2416,4922)
VS_XI: C24.1 R6.2 U2.18 Y3.2 | length 260.7
  Top Layer w10: Y3.2@2040,4561.42 v1(2040,4581) ; Y3.2@2042.32,4590.67 2042.32,4614.09 2081.89,4653.66 R6.2 2152.32,4659.09 2175.83,4682.6 U2.18
  Bottom Layer w10: v1(2040,4581) C24.1@2042.32,4578.66
VS_XO: C25.1 R6.1 U2.17 Y3.1 | length 235.7
  Top Layer w10: Y3.1@2042.32,4787.52 2042.32,4764.09 2081.89,4724.53 R6.1 2174.57,4702.28 U2.17
  Bottom Layer w10: C25.1 2044.59,4797.69 v1(2045.16,4797.69)
VSp: R14.1 R15.1 U1.10
XDCS: U1.21 U2.13 | length 724.3
  Top Layer w10: v1(2149,4581) 2149,4533 2113,4497 2113,4399 2215.79,4296.21 U1.21 ; v1(2170,4800) 2200,4800 2218.98,4781.02 U2.13
  Bottom Layer w10: v1(2149,4581) 2225,4657 2225,4755 2180,4800 v1(2170,4800)
pads on no net: Conn1.1 Conn1.6 Conn1.7 J1.0 J2.0 U1.2 U1.11 U1.12 U1.13 U1.14 U1.42 U1.45 U2.15 U2.27 U2.48 U7.1 U7.8 U7.9
copper on no net:
  other v2: 1681.8,3782.25 1996.76,3782.25

## Text inside footprints (layer, text, board x,y; h text height)
BT1: Top Overlay "+" at 3492.72,3705.51 h45.28 r90
Conn1: Top Overlay "1" at 1080,4698.16 h30 r270
U7: Bottom Overlay "KINMOX" at 1921,3896 h39.37; Bottom Overlay "TF CARD" at 1953,3996 h39.37